# Altium PCB New_LXe_twr.PcbDoc (part 3 of 5)
Units mm, origin at the board's own origin, x right, y up, seen from the top; angles counter-clockwise.
Board outline 130 x 150 mm, 6 copper layers (Top Layer, Internal Plane 1, MidLayer1, MidLayer2, Internal Plane 2, Bottom Layer); 673 components, 504 nets, 5569 pads, 803 vias.
Unrouted connection lines stored in the file: 633.
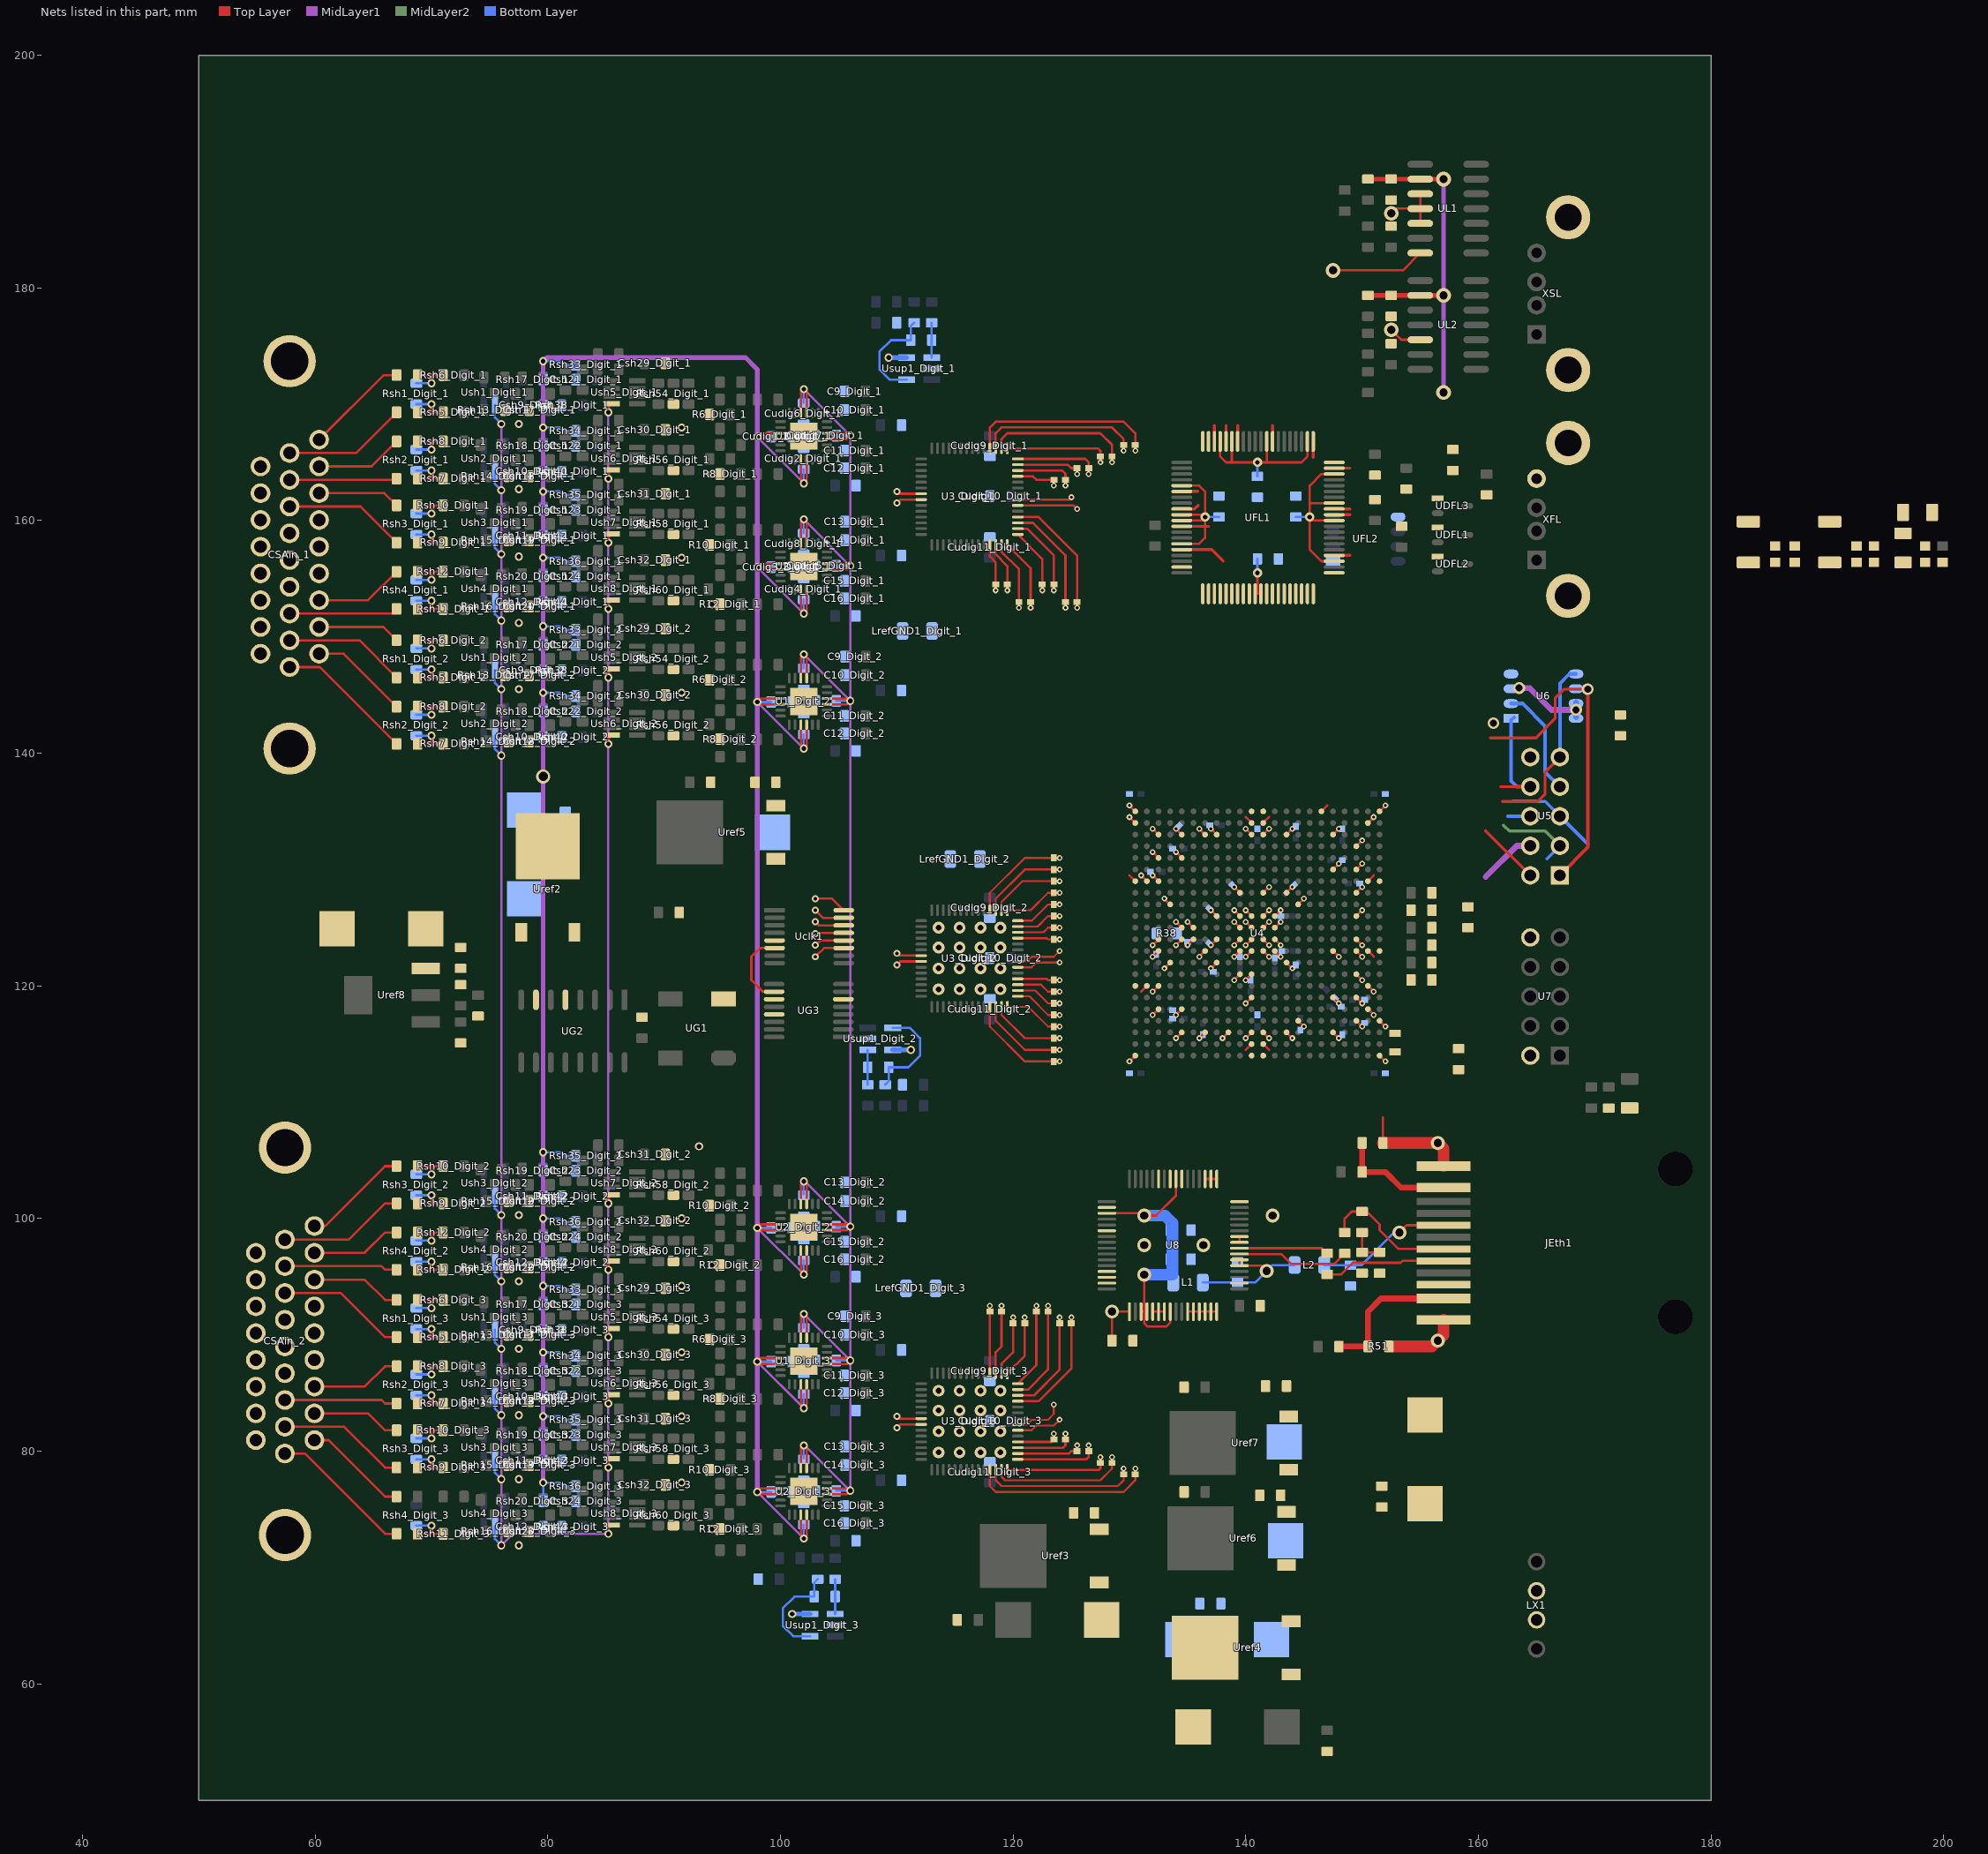
[diagram p7: the nets of this part, all layers, seen from the top]

## Via types
v1: diameter 0.5, hole 0.25, Top Layer to Bottom Layer, tented top, 430 vias
v2: diameter 0.7, hole 0.4, Top Layer to Bottom Layer, 251 vias
v3: diameter 1, hole 0.5, Top Layer to Bottom Layer, 48 vias
v4: diameter 0.6, hole 0.3, Top Layer to Bottom Layer, 31 vias
v5: diameter 1.2, hole 0.7, Top Layer to Bottom Layer, 12 vias
v6: diameter 1.016, hole 0.61, Top Layer to Bottom Layer, 9 vias
v7: diameter 1.27, hole 0.711, Top Layer to Bottom Layer, 9 vias
v8: diameter 5, hole 3, Top Layer to Bottom Layer, 6 vias
v9: diameter 0.8, hole 0.4, Top Layer to Bottom Layer, 4 vias
v10: diameter 0.6, hole 0.3, Top Layer to Bottom Layer, tented top, 2 vias
v11: diameter 1.2, hole 0.8, Top Layer to Bottom Layer, 1 vias

## Nets (pads, with @x,y where several pads share a name; then routed paths per layer and width w, separated by ;. In a path a pad name is that pad's centre, name@x,y a point inside that pad or via, vN(x,y) a via of type N, cw(c..) or ccw(c..) an arc to the next point about the centre after c; other vN are vias at no path point) (continued)
"+3.3 VDIG": C53.1 C54.2 C55.2 C56.2 C57.2 CIO1.2 CIO2.2 CIO3.2 CIO4.2 Csup12.+ Csup18.1 JEth1.1 JEth1.12 L1.1 R37.1 R38.1 R39.1 R40.1 R41.1 R51.1 R53.1 RFL1.1 RFL2.1 RFL3.2 RFL5.2 U4.L18 U5.4 U6.3 U6.7 U6.8 U8.3 U8.4 U8.8 U8.40 U8.51 UFL1.5 UFL1.10 UFL1.11 UFL1.15 UFL1.30 UFL1.31 UFL1.43 UFL1.50 UFL1.53 UFL1.58 UFL1.62 UFL1.69 UFL1.75 UFL1.77 UFL2.5 Uref4.4 | length 102.2
  Top Layer w0.2: U8.51@128.05,100.45 131.075,100.45 v5(131.27,100.255) 132.286,100.255 134,101.969 U8.40@134,103.4 ; U8.3@131,92 131.27,92 ; v5(131.27,95.175) 131.27,92 ; U8.4@131.5,92 131.27,92 ; U8.8@133.5,92 133.5,91.055 133.175,90.73 131.524,90.73 131.27,90.984 131.27,92 ; v1(134,123.5) U4.L18@134.5,124 ; UFL1.15@134.5,158 136,158 136.5,158.5 v9@136.5,160 ; UFL1.11@134.5,160 v9@136.5,160 ; UFL1.10@134.5,160.5 v9@136.5,160.5 ; UFL1.5@134.5,163 136,163 136.5,162.5 v9@136.5,160.5 ; UFL1.77@137.8,166.8 137.8,165.5 138.3,165 v9(141,165) 141.8,165 ; 138.8,165 UFL1.75@138.8,166.8 ; UFL1.30@140.8,153.7 141,153.7 ; v9(141,155.5) 141,153.7 ; UFL1.31@141.3,153.7 141,153.7 ; UFL1.69@141.8,166.8 141.8,165 ; UFL1.62@145.3,166.8 145.3,165.5 144.8,165 141.8,165 ; v9@145.5,160 UFL1.50@147.6,160 ; 145.6,161.5 UFL1.53@147.6,161.5 ; UFL1.43@147.6,156.5 146.5,156.5 145.5,157.5 145.5,163 146.5,164 UFL1.58@147.6,164 ; R53.1@151.8,106.5 151.8,108.7 ; v9@136.5,160 v9(136.5,160.3) v9@136.5,160.5
  Top Layer w1.016: R53.1@151.8,106.5 v5(156.5,106.5) 157,106 JEth1.1@157,104.5 ; R51.1@152.3,89 R51.1@152.554,89 156,89 v5(156.5,89.5) 157,90 JEth1.12@157,91.28
  MidLayer1 w0.508: 160.626,129.374 163.292,132.04 U5.4@164.46,132.04 ; v6(163.5,145.6) 164.4,145.6 166.276,143.724 v6(168.397,143.724)
  Bottom Layer w0.2: v9(136.5,160.3) CIO1.2@137.7,160.3 ; v9(141,155.5) CIO2.2@141,156.7 ; CIO4.2@141,163.8 v9(141,165) ; CIO3.2@144.3,160.3 v9(145.5,160.3)
  Bottom Layer w0.508: U6.8@168.397,143.089 U6.7@168.397,144.359
  Bottom Layer w1: v5(131.27,95.175) 133.7,95.175 133.7,99.6 133.045,100.255 v5(131.27,100.255)
"+5 V": CLED1.1 CSL1.1 CSL2.1 Csup10.+ Csup16.1 Cudig1_Digit_1.2 Cudig1_Digit_2.2 Cudig1_Digit_3.2 Cudig2_Digit_1.2 Cudig2_Digit_2.2 Cudig2_Digit_3.2 Cudig3_Digit_1.2 Cudig3_Digit_2.2 Cudig3_Digit_3.2 Cudig4_Digit_1.2 Cudig4_Digit_2.2 Cudig4_Digit_3.2 RDFL1.1 Rsh17_Digit_1.2 Rsh17_Digit_2.2 Rsh17_Digit_3.2 Rsh18_Digit_1.2 Rsh18_Digit_2.2 Rsh18_Digit_3.2 Rsh19_Digit_1.2 Rsh19_Digit_2.2 Rsh19_Digit_3.2 Rsh20_Digit_1.2 Rsh20_Digit_2.2 Rsh20_Digit_3.2 Rsh33_Digit_1.2 Rsh33_Digit_2.2 Rsh33_Digit_3.2 Rsh34_Digit_1.2 Rsh34_Digit_2.2 Rsh34_Digit_3.2 Rsh35_Digit_1.2 Rsh35_Digit_2.2 Rsh35_Digit_3.2 Rsh36_Digit_1.2 Rsh36_Digit_2.2 Rsh36_Digit_3.2 RSL1.2 RSL5.2 U1_Digit_1.3 U1_Digit_1.4 U1_Digit_1.9 U1_Digit_1.10 U1_Digit_2.3 U1_Digit_2.4 U1_Digit_2.9 U1_Digit_2.10 U1_Digit_3.3 U1_Digit_3.4 U1_Digit_3.9 U1_Digit_3.10 U2_Digit_1.3 U2_Digit_1.4 U2_Digit_1.9 U2_Digit_1.10 U2_Digit_2.3 U2_Digit_2.4 U2_Digit_2.9 U2_Digit_2.10 U2_Digit_3.3 U2_Digit_3.4 U2_Digit_3.9 U2_Digit_3.10 UL1.2 UL2.2 Uref2.4 Usup1_Digit_1.5 Usup1_Digit_2.5 Usup1_Digit_3.5 VDLED1.ANOD VDLED2.ANOD VDLED3.ANOD | length 401.2
  Top Layer w0.2: U2_Digit_3.4@100,76.3 98.2,76.3 v2(98,76.5) 98.3,76.8 U2_Digit_3.3@100,76.8 ; U1_Digit_3.4@100,87.5 98.2,87.5 v2(98,87.7) 98.3,88 U1_Digit_3.3@100,88 ; U2_Digit_2.4@100,99 98.2,99 v2(98,99.2) 98.3,99.5 U2_Digit_2.3@100,99.5 ; U1_Digit_2.4@100,144.2 98.2,144.2 v2(98,144.4) 98.3,144.7 U1_Digit_2.3@100,144.7 ; U2_Digit_1.4@100,155.8 98.2,155.8 v2(98,156) 98.3,156.3 U2_Digit_1.3@100,156.3 ; U1_Digit_1.4@100,167 98.2,167 v2(98,167.2) 98.3,167.5 U1_Digit_1.3@100,167.5 ; U2_Digit_3.9@101.75,74.55 101.75,72.75 v2(102,72.5) 102.25,72.75 U2_Digit_3.10@102.25,74.55 ; U1_Digit_3.9@101.75,85.75 101.75,83.95 v2(102,83.7) 102.25,83.95 U1_Digit_3.10@102.25,85.75 ; U2_Digit_2.9@101.75,97.25 101.75,95.45 v2(102,95.2) 102.25,95.45 U2_Digit_2.10@102.25,97.25 ; U1_Digit_2.9@101.75,142.45 101.75,140.65 v2(102,140.4) 102.25,140.65 U1_Digit_2.10@102.25,142.45 ; U2_Digit_1.9@101.75,154.05 101.75,152.25 v2(102,152) 102.25,152.25 U2_Digit_1.10@102.25,154.05 ; U1_Digit_1.9@101.75,165.25 101.75,163.45 v2(102,163.2) 102.25,163.45 U1_Digit_1.10@102.25,165.25
  Top Layer w0.254: v6@161.009,142.857 v6(161.285,142.581)
  Top Layer w0.4: RSL5.2@150.5,179.35 CSL2.1@152.5,179.35 UL2.2@155,179.35 v7(157,179.35) ; RSL1.2@150.5,189.35 CSL1.1@152.5,189.35 UL1.2@155,189.35 v7(157,189.35)
  MidLayer1 w0.2: v2(98,76.5) v2(102,72.5) ; v2(98,87.7) v2(102,83.7) ; v2(98,99.2) v2(102,95.2) ; v2(98,144.4) v2(102,140.4) ; v2(98,156) v2(102,152) ; v2(98,167.2) v2(102,163.2)
  MidLayer1 w0.4: v2(79.6,77.3) v2(79.6,94.2) v2(79.6,100) v11(79.6,138) v2(79.6,150.9) v2(79.6,156.8) v2(79.6,168) v2(79.6,173.7) 79.9,174 97,174 98,173 v2(98,167.2) v2(98,156) v2(98,144.4) v2(98,99.2) v2(98,87.7) v2(98,76.5) ; v7(157,171) v7(157,179.35) v7(157,189.35)
  Bottom Layer w0.2: Rsh20_Digit_3.2@79.6,75.7 v2(79.6,77.3) 81,77.3 81.3,77 Rsh36_Digit_3.2@82.146,77 Rsh36_Digit_3.2@82.4,77 ; Rsh19_Digit_3.2@79.6,81.4 v2(79.6,83) 81,83 81.3,82.7 Rsh35_Digit_3.2@82.146,82.7 Rsh35_Digit_3.2@82.4,82.7 ; Rsh18_Digit_3.2@79.6,87.256 v2(79.6,88.5) 81,88.5 81.3,88.2 Rsh34_Digit_3.2@82.146,88.2 Rsh34_Digit_3.2@82.4,88.2 ; Rsh17_Digit_3.2@79.6,92.956 v2(79.6,94.2) 81,94.2 81.3,93.9 Rsh33_Digit_3.2@82.146,93.9 Rsh33_Digit_3.2@82.4,93.9 ; Rsh20_Digit_2.2@79.6,98.4 v2(79.6,100) 81,100 81.3,99.7 Rsh36_Digit_2.2@82.146,99.7 Rsh36_Digit_2.2@82.4,99.7 ; Rsh19_Digit_2.2@79.6,104.1 v2(79.6,105.7) 81,105.7 81.3,105.4 Rsh35_Digit_2.2@82.146,105.4 Rsh35_Digit_2.2@82.4,105.4 ; Rsh18_Digit_2.2@79.6,143.6 Rsh18_Digit_2.2@79.6,143.956 v2(79.6,145.2) 81,145.2 81.3,144.9 Rsh34_Digit_2.2@82.146,144.9 Rsh34_Digit_2.2@82.4,144.9 ; Rsh17_Digit_2.2@79.6,149.3 Rsh17_Digit_2.2@79.6,149.656 v2(79.6,150.9) 81,150.9 81.3,150.6 Rsh33_Digit_2.2@82.146,150.6 Rsh33_Digit_2.2@82.4,150.6 ; Rsh20_Digit_1.2@79.6,155.2 v2(79.6,156.8) 81,156.8 81.3,156.5 Rsh36_Digit_1.2@82.146,156.5 Rsh36_Digit_1.2@82.4,156.5 ; Rsh19_Digit_1.2@79.6,160.9 v2(79.6,162.5) 81,162.5 81.3,162.2 Rsh35_Digit_1.2@82.146,162.2 Rsh35_Digit_1.2@82.4,162.2 ; Rsh18_Digit_1.2@79.6,166.4 Rsh18_Digit_1.2@79.6,166.756 v2(79.6,168) 81,168 81.3,167.7 Rsh34_Digit_1.2@82.146,167.7 Rsh34_Digit_1.2@82.4,167.7 ; Rsh17_Digit_1.2@79.6,172.1 Rsh17_Digit_1.2@79.6,172.456 v2(79.6,173.7) 81,173.7 81.3,173.4 Rsh33_Digit_1.2@82.146,173.4 Rsh33_Digit_1.2@82.4,173.4 ; v2(98,76.5) Cudig3_Digit_3.2@99.2,76.5 ; v2(98,87.7) Cudig2_Digit_3.2@99.2,87.7 ; v2(98,99.2) Cudig4_Digit_2.2@99.2,99.2 ; v2(98,144.4) Cudig2_Digit_2.2@99.2,144.4 ; v2(98,156) Cudig3_Digit_1.2@98.946,156 Cudig3_Digit_1.2@99.2,156 ; v2(98,167.2) Cudig1_Digit_1.2@98.946,167.2 Cudig1_Digit_1.2@99.2,167.2 ; v2(102,72.5) Cudig4_Digit_3.2@102,73.7 ; v2(102,83.7) Cudig1_Digit_3.2@102,84.9 ; v2(102,95.2) Cudig3_Digit_2.2@102,96.4 ; v2(102,140.4) Cudig1_Digit_2.2@102,141.6 ; v2(102,152) Cudig4_Digit_1.2@102,152.946 Cudig4_Digit_1.2@102,153.2 ; v2(102,163.2) Cudig2_Digit_1.2@102,164.146 Cudig2_Digit_1.2@102,164.4
  Bottom Layer w0.4: v2(101,66) Usup1_Digit_3.5@102.55,66 ; v2(109.3,174) Usup1_Digit_1.5@110.85,174 ; Usup1_Digit_2.5@109.65,114.5 v2(111.2,114.5)
"+7 V": Csup2.+ Csup3.1 Csup4.1 Csup5.1 Csup6.1 Csup7.1 LX1.2 Uref2.3 Uref3.3 Uref4.3 Uref5.3 Uref6.3 Uref7.3
"+12 V": CSAin_1.23 CSAin_2.23
"-2 V": Csup9.- Csup22.1 Rref2.1 Uref8.3 Ush1_Digit_1.2 Ush1_Digit_2.2 Ush1_Digit_3.2 Ush2_Digit_1.2 Ush2_Digit_2.2 Ush2_Digit_3.2 Ush3_Digit_1.2 Ush3_Digit_2.2 Ush3_Digit_3.2 Ush4_Digit_1.2 Ush4_Digit_2.2 Ush4_Digit_3.2 Ush5_Digit_1.4 Ush5_Digit_2.4 Ush5_Digit_3.4 Ush6_Digit_1.4 Ush6_Digit_2.4 Ush6_Digit_3.4 Ush7_Digit_1.4 Ush7_Digit_2.4 Ush7_Digit_3.4 Ush8_Digit_1.4 Ush8_Digit_2.4 Ush8_Digit_3.4 | length 235.4
  Top Layer w0.2: v2(85.2,72.9) 85.2,73.35 Ush8_Digit_3.4@85.5,73.65 ; v2(85.2,78.6) 85.2,79.05 Ush7_Digit_3.4@85.5,79.35 ; v2(85.2,84.1) 85.2,84.55 Ush6_Digit_3.4@85.5,84.85 ; v2(85.2,89.8) 85.2,90.25 Ush5_Digit_3.4@85.5,90.55 ; v2(85.2,95.6) 85.2,96.05 Ush8_Digit_2.4@85.5,96.35 ; v2(85.2,101.3) 85.2,101.75 Ush7_Digit_2.4@85.5,102.05 ; v2(85.2,140.8) 85.2,141.25 Ush6_Digit_2.4@85.5,141.55 ; v2(85.2,146.5) 85.2,146.95 Ush5_Digit_2.4@85.5,147.25 ; v2(85.2,152.4) 85.2,152.85 Ush8_Digit_1.4@85.5,153.15 ; v2(85.2,158.1) 85.2,158.55 Ush7_Digit_1.4@85.5,158.85 ; v2(85.2,163.6) 85.2,164.05 Ush6_Digit_1.4@85.5,164.35 ; v2(85.2,169.3) 85.2,169.75 Ush5_Digit_1.4@85.5,170.05
  MidLayer1 w0.2: v2(76,168.3) v2(76,162.6) v2(76,157.1) v2(76,151.4) v2(76,145.5) v2(76,139.8) v2(76,100.3) v2(76,94.6) v2(76,88.8) v2(76,83.1) v2(76,77.6) v2(76,71.9) 77,72.9 v2(85.2,72.9) v2(85.2,84.1) v2(85.2,89.8) v2(85.2,95.6) v2(85.2,140.8) v2(85.2,146.5) v2(85.2,152.4) v2(85.2,163.6) v2(85.2,169.3)
  Bottom Layer w0.2: Ush4_Digit_3.2@75.45,73.55 75.45,72.45 v2(76,71.9) ; Ush3_Digit_3.2@75.45,79.25 75.45,78.15 v2(76,77.6) ; Ush2_Digit_3.2@75.45,84.75 75.45,83.65 v2(76,83.1) ; Ush1_Digit_3.2@75.45,90.45 75.45,89.35 v2(76,88.8) ; Ush4_Digit_2.2@75.45,96.25 75.45,95.15 v2(76,94.6) ; Ush3_Digit_2.2@75.45,101.95 75.45,100.85 v2(76,100.3) ; Ush2_Digit_2.2@75.45,141.45 75.45,140.35 v2(76,139.8) ; Ush1_Digit_2.2@75.45,147.15 75.45,146.05 v2(76,145.5) ; Ush4_Digit_1.2@75.45,153.05 75.45,151.95 v2(76,151.4) ; Ush3_Digit_1.2@75.45,158.75 75.45,157.65 v2(76,157.1) ; Ush2_Digit_1.2@75.45,164.25 75.45,163.15 v2(76,162.6) ; Ush1_Digit_1.2@75.45,169.95 75.45,168.85 v2(76,168.3)
"-3 V": Cudig5_Digit_1.2 Cudig5_Digit_2.2 Cudig5_Digit_3.2 Cudig6_Digit_1.2 Cudig6_Digit_2.2 Cudig6_Digit_3.2 Cudig7_Digit_1.2 Cudig7_Digit_2.2 Cudig7_Digit_3.2 Cudig8_Digit_1.2 Cudig8_Digit_2.2 Cudig8_Digit_3.2 U1_Digit_1.15 U1_Digit_1.16 U1_Digit_1.21 U1_Digit_1.22 U1_Digit_2.15 U1_Digit_2.16 U1_Digit_2.21 U1_Digit_2.22 U1_Digit_3.15 U1_Digit_3.16 U1_Digit_3.21 U1_Digit_3.22 U2_Digit_1.15 U2_Digit_1.16 U2_Digit_1.21 U2_Digit_1.22 U2_Digit_2.15 U2_Digit_2.16 U2_Digit_2.21 U2_Digit_2.22 U2_Digit_3.15 U2_Digit_3.16 U2_Digit_3.21 U2_Digit_3.22 | length 189.1
  Top Layer w0.2: U2_Digit_3.22@101.75,78.55 101.75,80.25 v2(102,80.5) 102.25,80.25 U2_Digit_3.21@102.25,78.55 ; U1_Digit_3.22@101.75,89.75 101.75,91.55 v2(102,91.8) 102.25,91.55 U1_Digit_3.21@102.25,89.75 ; U2_Digit_2.22@101.75,101.25 101.75,102.95 v2(102,103.2) 102.25,102.95 U2_Digit_2.21@102.25,101.25 ; U1_Digit_2.22@101.75,146.45 101.75,148.25 v2(102,148.5) 102.25,148.25 U1_Digit_2.21@102.25,146.45 ; U2_Digit_1.22@101.75,158.05 101.75,159.85 v2(102,160.1) 102.25,159.85 U2_Digit_1.21@102.25,158.05 ; U1_Digit_1.22@101.75,169.25 101.75,171.05 v2(102,171.3) 102.25,171.05 U1_Digit_1.21@102.25,169.25 ; U2_Digit_3.15@104,76.3 105.7,76.3 v2(106,76.6) 105.8,76.8 U2_Digit_3.16@104,76.8 ; U1_Digit_3.15@104,87.5 105.7,87.5 v2(106,87.8) 105.8,88 U1_Digit_3.16@104,88 ; U2_Digit_2.15@104,99 105.7,99 v2(106,99.3) 105.8,99.5 U2_Digit_2.16@104,99.5 ; U1_Digit_2.15@104,144.2 105.7,144.2 v2(106,144.5) 105.8,144.7 U1_Digit_2.16@104,144.7 ; U2_Digit_1.15@104,155.8 105.7,155.8 v2(106,156.1) 105.8,156.3 U2_Digit_1.16@104,156.3 ; U1_Digit_1.15@104,167 105.7,167 v2(106,167.3) 105.8,167.5 U1_Digit_1.16@104,167.5
  MidLayer1 w0.2: v2(102,91.8) v2(106,87.8) v2(106,76.6) v2@102.1,80.5 ; v2(102,148.5) v2(106,144.5) ; v2(102,160.1) v2(106,156.1) ; v2(102,171.3) v2(106,167.3) v2(106,156.1) ; v2@102.1,103.2 v2(106,99.3) ; v2@106,88.1 v2(106,99.3) ; v2(106,99.3) v2(106,144.5) ; v2(106,144.5) v2(106,156.1)
  Bottom Layer w0.2: Cudig7_Digit_3.2@102,79.4 102,79.654 v2@102,80.6 ; Cudig6_Digit_3.2@102,90.6 102,90.854 v2(102,91.8) ; Cudig7_Digit_2.2@102,102.1 102,102.354 v2@102,103.3 ; Cudig6_Digit_2.2@102,147.3 102,147.554 v2(102,148.5) ; Cudig8_Digit_1.2@102,158.9 Cudig8_Digit_1.2@102,159.154 v2(102,160.1) ; Cudig6_Digit_1.2@102,170.1 Cudig6_Digit_1.2@102,170.354 v2(102,171.3) ; Cudig8_Digit_3.2@104.8,76.6 v2(106,76.6) ; Cudig5_Digit_3.2@104.8,87.8 v2(106,87.8) ; Cudig8_Digit_2.2@104.8,99.3 v2(106,99.3) ; Cudig5_Digit_2.2@104.8,144.5 v2(106,144.5) ; Cudig5_Digit_1.2@104.8,156.1 v2(106,156.1) ; Cudig7_Digit_1.2@104.8,167.3 v2(106,167.3)
"-6 V": CSAin_1.22 CSAin_2.22
ADC_1_CLK_N: U3_Digit_1.21 Uclk1.15 | length 4.9
  Top Layer w0.2: v4(103,126.5) 103.65,125.85 Uclk1.15@105.44,125.85 ; v4(110,162.5) 110.2,162.3 U3_Digit_1.21@112.1,162.3
ADC_1_CLK_P: U3_Digit_1.22 Uclk1.16 | length 5.1
  Top Layer w0.2: v4(103,127.5) 104.44,127.5 Uclk1.16@105.44,126.5 ; v4(110,161.5) 110.3,161.8 U3_Digit_1.22@112.1,161.8
ADC_2_CLK_N: U3_Digit_2.21 Uclk1.13 | length 4.6
  Top Layer w0.2: v4(103,124.5) 103.05,124.55 Uclk1.13@105.44,124.55 ; v4(110,122.8) 110.2,122.6 U3_Digit_2.21@112.1,122.6
ADC_2_CLK_P: U3_Digit_2.22 Uclk1.14 | length 4.8
  Top Layer w0.2: v4(103,125.5) 103.3,125.2 Uclk1.14@105.44,125.2 ; v4(110,121.8) 110.3,122.1 U3_Digit_2.22@112.1,122.1
ADC_3_CLK_N: U3_Digit_3.21 Uclk1.11 | length 4.9
  Top Layer w0.2: v4(103,122.5) 103.75,123.25 Uclk1.11@105.44,123.25 ; v4(110,83) 110.2,82.8 U3_Digit_3.21@112.1,82.8
ADC_3_CLK_P: U3_Digit_3.22 Uclk1.12 | length 4.8
  Top Layer w0.2: v4(103,123.5) 103.4,123.9 Uclk1.12@105.44,123.9 ; v4(110,82) 110.3,82.3 U3_Digit_3.22@112.1,82.3
ADC_CLK: Uclk1.6 UG3.10 | length 6.7
  Top Layer w0.2: UG3.10@99.46,119.5 98.5,119.5 97.5,120.5 97.5,122.5 98.25,123.25 Uclk1.6@99.5,123.25
ADC_DCH1_0+: R30_Digit_1.1 U3_Digit_1.3 | length 13.9
  Top Layer w0.175: v1(129.5,166) R30_Digit_1.1@129.5,166.5
  Top Layer w0.2: U3_Digit_1.3@118.5,166.2 118.5,167.5 119,168 128.5,168 129.5,167 R30_Digit_1.1@129.5,166.5
ADC_DCH1_0-: R30_Digit_1.2 U3_Digit_1.4 | length 16.4
  Top Layer w0.175: v1(130.5,166) R30_Digit_1.2@130.5,166.5
  Top Layer w0.2: U3_Digit_1.4@118,166.2 118,168 118.5,168.5 129.5,168.5 130.5,167.5 R30_Digit_1.2@130.5,166.5
ADC_DCH1_1+: R29_Digit_1.1 U3_Digit_1.1 | length 9.1
  Top Layer w0.175: v1(127.5,165) R29_Digit_1.1@127.5,165.5
  Top Layer w0.2: U3_Digit_1.1@119.5,166.2 127.3,166.2 127.5,166 R29_Digit_1.1@127.5,165.5
ADC_DCH1_1-: R29_Digit_1.2 U3_Digit_1.2 | length 12.4
  Top Layer w0.175: v1(128.5,165) R29_Digit_1.2@128.5,165.5
  Top Layer w0.2: U3_Digit_1.2@119,166.2 119,167 119.5,167.5 127.5,167.5 128.5,166.5 R29_Digit_1.2@128.5,165.5
ADC_DCH2_0+: R31_Digit_1.2 U3_Digit_1.55 | length 5.7
  Top Layer w0.175: v1(125.5,164) R31_Digit_1.2@125.5,164.5
  Top Layer w0.2: U3_Digit_1.55@120.4,164.8 124.7,164.8 125,164.5 R31_Digit_1.2@125.5,164.5
ADC_DCH2_0-: R31_Digit_1.1 U3_Digit_1.56 | length 7.2
  Top Layer w0.175: v1(126.5,164) R31_Digit_1.1@126.5,164.5
  Top Layer w0.2: U3_Digit_1.56@120.4,165.3 126.2,165.3 126.5,165 R31_Digit_1.1@126.5,164.5
ADC_DCH2_1+: R32_Digit_1.2 U3_Digit_1.53 | length 3.7
  Top Layer w0.175: v1(123.5,163) R32_Digit_1.2@123.5,163.5
  Top Layer w0.2: U3_Digit_1.53@120.4,163.8 121.7,163.8 122,163.5 R32_Digit_1.2@123.5,163.5
ADC_DCH2_1-: R32_Digit_1.1 U3_Digit_1.54 | length 5.2
  Top Layer w0.175: v1(124.5,163) R32_Digit_1.1@124.5,163.5
  Top Layer w0.2: U3_Digit_1.54@120.4,164.3 124.2,164.3 124.5,164 R32_Digit_1.1@124.5,163.5
ADC_DCH3_0+: R33_Digit_1.2 U3_Digit_1.45 | length 9.8
  Top Layer w0.175: v1(124.5,152.5) R33_Digit_1.2@124.5,153
  Top Layer w0.2: U3_Digit_1.45@120.4,159.8 121.7,159.8 124.5,157 R33_Digit_1.2@124.5,153
ADC_DCH3_0-: R33_Digit_1.1 U3_Digit_1.46 | length 11
  Top Layer w0.175: v1(125.5,152.5) R33_Digit_1.1@125.5,153
  Top Layer w0.2: U3_Digit_1.46@120.4,160.3 122.2,160.3 125.5,157 R33_Digit_1.1@125.5,153
ADC_DCH3_1+: R34_Digit_1.2 U3_Digit_1.43 | length 5.7
  Top Layer w0.175: v1(122.5,154) R34_Digit_1.2@122.5,154.5
  Top Layer w0.2: U3_Digit_1.43@120.4,158.8 122.5,156.7 R34_Digit_1.2@122.5,154.5
ADC_DCH3_1-: R34_Digit_1.1 U3_Digit_1.44 | length 7.1
  Top Layer w0.175: v1(123.5,154) R34_Digit_1.1@123.5,154.5
  Top Layer w0.2: U3_Digit_1.44@120.4,159.3 121.2,159.3 123.5,157 R34_Digit_1.1@123.5,154.5
ADC_DCH4_0+: R35_Digit_1.2 U3_Digit_1.41 | length 6
  Top Layer w0.175: v1(120.5,152.5) R35_Digit_1.2@120.5,153
  Top Layer w0.2: U3_Digit_1.41@119,157.9 119,157.3 120.5,155.8 R35_Digit_1.2@120.5,153
ADC_DCH4_0-: R35_Digit_1.1 U3_Digit_1.42 | length 6.2
  Top Layer w0.175: v1(121.5,152.5) R35_Digit_1.1@121.5,153
  Top Layer w0.2: U3_Digit_1.42@119.5,157.9 121.5,155.9 R35_Digit_1.1@121.5,153
ADC_DCH4_1+: R36_Digit_1.2 U3_Digit_1.39 | length 4.1
  Top Layer w0.175: v1(118.5,154) R36_Digit_1.2@118.5,154.5
  Top Layer w0.2: U3_Digit_1.39@118,157.9 118,156.9 118.5,156.4 R36_Digit_1.2@118.5,154.5
ADC_DCH4_1-: R36_Digit_1.1 U3_Digit_1.40 | length 4.3
  Top Layer w0.175: v1(119.5,154) R36_Digit_1.1@119.5,154.5
  Top Layer w0.2: U3_Digit_1.40@118.5,157.9 118.5,157.1 119.5,156.1 R36_Digit_1.1@119.5,154.5
ADC_DCH5_0+: R30_Digit_2.1 U3_Digit_2.3 | length 7.5
  Top Layer w0.175: U3_Digit_2.3@118.5,126.5 118.5,127.5 121,130 v1(124,130)
ADC_DCH5_0-: R30_Digit_2.2 U3_Digit_2.4 | length 8.7
  Top Layer w0.175: U3_Digit_2.4@118,126.5 118,128 121,131 v1(124,131)
ADC_DCH5_5+: R29_Digit_2.1 U3_Digit_2.1 | length 5.1
  Top Layer w0.175: U3_Digit_2.1@119.5,126.5 121.5,126.5 123,128 v1(124,128)
ADC_DCH5_5-: R29_Digit_2.2 U3_Digit_2.2 | length 6.4
  Top Layer w0.175: U3_Digit_2.2@119,126.5 119,127.2 120.8,129 v1(124,129)
ADC_DCH6_0+: R31_Digit_2.2 U3_Digit_2.55 | length 4
  Top Layer w0.175: U3_Digit_2.55@120.4,125.1 122.1,125.1 123,126 R31_Digit_2.2@123.5,126 v1(124,126)
ADC_DCH6_0-: R31_Digit_2.1 U3_Digit_2.56 | length 4.2
  Top Layer w0.175: U3_Digit_2.56@120.4,125.6 121.6,125.6 123,127 R31_Digit_2.1@123.5,127 v1(124,127)
ADC_DCH6_1+: R32_Digit_2.2 U3_Digit_2.53 | length 3.6
  Top Layer w0.175: U3_Digit_2.53@120.4,124.1 122.9,124.1 123,124 R32_Digit_2.2@123.5,124 v1(124,124)
ADC_DCH6_1-: R32_Digit_2.1 U3_Digit_2.54 | length 3.8
  Top Layer w0.175: U3_Digit_2.54@120.4,124.6 122.6,124.6 123,125 R32_Digit_2.1@123.5,125 v1(124,125)
ADC_DCH7_0+: R33_Digit_2.2 U3_Digit_2.45 | length 3.8
  Top Layer w0.175: U3_Digit_2.45@120.4,120.1 122.4,120.1 123,119.5 R33_Digit_2.2@123.5,119.5 v1(124,119.5)
ADC_DCH7_0-: R33_Digit_2.1 U3_Digit_2.46 | length 3.6
  Top Layer w0.175: U3_Digit_2.46@120.4,120.6 122.9,120.6 123,120.5 R33_Digit_2.1@123.5,120.5 v1(124,120.5)
ADC_DCH7_1+: R34_Digit_2.2 U3_Digit_2.43 | length 4.3
  Top Layer w0.175: U3_Digit_2.43@120.4,119.1 121.4,119.1 123,117.5 R34_Digit_2.2@123.5,117.5 v1(124,117.5)
ADC_DCH7_1-: R34_Digit_2.1 U3_Digit_2.44 | length 4.1
  Top Layer w0.175: U3_Digit_2.44@120.4,119.6 121.9,119.6 123,118.5 R34_Digit_2.1@123.5,118.5 v1(124,118.5)
ADC_DCH8_0+: R35_Digit_2.2 U3_Digit_2.41 | length 6.5
  Top Layer w0.175: U3_Digit_2.41@119,118.2 119,117.5 121,115.5 R35_Digit_2.2@123.5,115.5 v1(124,115.5)
ADC_DCH8_0-: R35_Digit_2.1 U3_Digit_2.42 | length 5.2
  Top Layer w0.175: U3_Digit_2.42@119.5,118.2 121.3,118.2 123,116.5 R35_Digit_2.1@123.5,116.5 v1(124,116.5)
ADC_DCH8_1+: R36_Digit_2.2 U3_Digit_2.39 | length 8.9
  Top Layer w0.175: U3_Digit_2.39@118,118.2 118,116.5 121,113.5 R36_Digit_2.2@123.5,113.5 v1(124,113.5)
ADC_DCH8_1-: R36_Digit_2.1 U3_Digit_2.40 | length 7.7
  Top Layer w0.175: U3_Digit_2.40@118.5,118.2 118.5,117 121,114.5 R36_Digit_2.1@123.5,114.5 v1(124,114.5)
ADC_DCH9_0+: R30_Digit_3.1 U3_Digit_3.3 | length 6
  Top Layer w0.175: R30_Digit_3.1@119,92 v1(119,92.5)
  Top Layer w0.2: U3_Digit_3.3@118.5,86.7 118.5,88.5 119,89 R30_Digit_3.1@119,92
ADC_DCH9_0-: R30_Digit_3.2 U3_Digit_3.4 | length 5.8
  Top Layer w0.175: R30_Digit_3.2@118,92 v1(118,92.5)
  Top Layer w0.2: U3_Digit_3.4@118,86.7 R30_Digit_3.2@118,92
ADC_DCH9_9+: R29_Digit_3.1 U3_Digit_3.1 | length 5.4
  Top Layer w0.175: R29_Digit_3.1@121,91 v1(121,91.5)
  Top Layer w0.2: U3_Digit_3.1@119.5,86.7 121,88.2 R29_Digit_3.1@121,91
ADC_DCH9_9-: R29_Digit_3.2 U3_Digit_3.2 | length 5.2
  Top Layer w0.175: R29_Digit_3.2@120,91 v1(120,91.5)
  Top Layer w0.2: U3_Digit_3.2@119,86.7 119,87.5 120,88.5 R29_Digit_3.2@120,91
ADC_DCH10_0+: R31_Digit_3.2 U3_Digit_3.55 | length 8.8
  Top Layer w0.175: R31_Digit_3.2@123,92 v1(123,92.5)
  Top Layer w0.2: U3_Digit_3.55@120.4,85.3 121.3,85.3 123,87 R31_Digit_3.2@123,92
ADC_DCH10_0-: R31_Digit_3.1 U3_Digit_3.56 | length 7.4
  Top Layer w0.175: R31_Digit_3.1@122,92 v1(122,92.5)
  Top Layer w0.2: U3_Digit_3.56@120.4,85.8 122,87.4 R31_Digit_3.1@122,92
ADC_DCH10_1+: R32_Digit_3.2 U3_Digit_3.53 | length 10.2
  Top Layer w0.175: R32_Digit_3.2@125,91 v1(125,91.5)
  Top Layer w0.2: U3_Digit_3.53@120.4,84.3 122.2,84.3 125,87.1 R32_Digit_3.2@125,91
ADC_DCH10_1-: R32_Digit_3.1 U3_Digit_3.54 | length 9
  Top Layer w0.175: R32_Digit_3.1@124,91 v1(124,91.5)
  Top Layer w0.2: U3_Digit_3.54@120.4,84.8 121.8,84.8 124,87 R32_Digit_3.1@124,91
ADC_DCH11_0+: R33_Digit_3.2 U3_Digit_3.45 | length 5.2
  Top Layer w0.175: R33_Digit_3.2@124.5,81 v1(124.5,81.5)
  Top Layer w0.2: U3_Digit_3.45@120.4,80.3 124.3,80.3 124.5,80.5 R33_Digit_3.2@124.5,81
ADC_DCH11_0-: R33_Digit_3.1 U3_Digit_3.46 | length 3.7
  Top Layer w0.175: R33_Digit_3.1@123.5,81 v1(123.5,81.5)
  Top Layer w0.2: U3_Digit_3.46@120.4,80.8 123.3,80.8 R33_Digit_3.1@123.5,81
ADC_DCH11_1+: R34_Digit_3.2 U3_Digit_3.43 | length 7.2
  Top Layer w0.175: R34_Digit_3.2@126.5,80 v1(126.5,80.5)
  Top Layer w0.2: U3_Digit_3.43@120.4,79.3 126.3,79.3 126.5,79.5 R34_Digit_3.2@126.5,80
ADC_DCH11_1-: R34_Digit_3.1 U3_Digit_3.44 | length 5.7
  Top Layer w0.175: R34_Digit_3.1@125.5,80 v1(125.5,80.5)
  Top Layer w0.2: U3_Digit_3.44@120.4,79.8 124.8,79.8 125,80 R34_Digit_3.1@125.5,80
ADC_DCH12_0+: R35_Digit_3.2 U3_Digit_3.41 | length 11.6
  Top Layer w0.175: U3_Digit_3.41@119,78.4 119,77.8 119.3,77.5 127.5,77.5 128.5,78.5 R35_Digit_3.2@128.5,79 v1(128.5,79.5)
ADC_DCH12_0-: R35_Digit_3.1 U3_Digit_3.42 | length 9
  Top Layer w0.175: R35_Digit_3.1@127.5,79 v1(127.5,79.5)
  Top Layer w0.2: U3_Digit_3.42@119.5,78.4 127.4,78.4 127.5,78.5 R35_Digit_3.1@127.5,79
ADC_DCH12_1+: R36_Digit_3.2 U3_Digit_3.39 | length 15.5
  Top Layer w0.175: U3_Digit_3.39@118,78.4 118,77 118.5,76.5 129.5,76.5 130.5,77.5 R36_Digit_3.2@130.5,78 v1(130.5,78.5)
ADC_DCH12_1-: R36_Digit_3.1 U3_Digit_3.40 | length 13.3
  Top Layer w0.175: U3_Digit_3.40@118.5,78.4 118.5,77.5 119,77 129,77 129.5,77.5 R36_Digit_3.1@129.5,78 v1(129.5,78.5)
AGND: C1_Digit_1.1 C1_Digit_2.1 C1_Digit_3.1 C2_Digit_1.1 C2_Digit_2.1 C2_Digit_3.1 C3_Digit_1.1 C3_Digit_2.1 C3_Digit_3.1 C4_Digit_1.1 C4_Digit_2.1 C4_Digit_3.1 C9_Digit_1.2 C9_Digit_2.2 C9_Digit_3.2 C10_Digit_1.1 C10_Digit_2.1 C10_Digit_3.1 C11_Digit_1.2 C11_Digit_2.2 C11_Digit_3.2 C12_Digit_1.1 C12_Digit_2.1 C12_Digit_3.1 C13_Digit_1.2 C13_Digit_2.2 C13_Digit_3.2 C14_Digit_1.1 C14_Digit_2.1 C14_Digit_3.1 C15_Digit_1.2 C15_Digit_2.2 C15_Digit_3.2 C16_Digit_1.1 C16_Digit_2.1 C16_Digit_3.1 CSAin_1.4 CSAin_1.5 CSAin_1.6 CSAin_1.13 CSAin_1.14 CSAin_1.15 CSAin_1.19 CSAin_1.20 CSAin_1.21 CSAin_1.24 CSAin_1.25 CSAin_1.26 CSAin_1.27 CSAin_1.28 CSAin_2.4 CSAin_2.5 CSAin_2.6 CSAin_2.13 CSAin_2.14 CSAin_2.15 CSAin_2.19 CSAin_2.20 CSAin_2.21 CSAin_2.24 CSAin_2.25 CSAin_2.26 CSAin_2.27 CSAin_2.28 Csh9_Digit_1.2 Csh9_Digit_2.2 Csh9_Digit_3.2 Csh10_Digit_1.2 Csh10_Digit_2.2 Csh10_Digit_3.2 Csh11_Digit_1.2 Csh11_Digit_2.2 Csh11_Digit_3.2 Csh12_Digit_1.2 Csh12_Digit_2.2 Csh12_Digit_3.2 Csh17_Digit_1.2 Csh17_Digit_2.2 Csh17_Digit_3.2 Csh18_Digit_1.2 Csh18_Digit_2.2 Csh18_Digit_3.2 Csh19_Digit_1.2 Csh19_Digit_2.2 Csh19_Digit_3.2 Csh20_Digit_1.2 Csh20_Digit_2.2 Csh20_Digit_3.2 Csh21_Digit_1.2 Csh21_Digit_2.2 Csh21_Digit_3.2 Csh22_Digit_1.2 Csh22_Digit_2.2 Csh22_Digit_3.2 Csh23_Digit_1.2 Csh23_Digit_2.2 Csh23_Digit_3.2 Csh24_Digit_1.2 Csh24_Digit_2.2 Csh24_Digit_3.2 Csh29_Digit_1.2 Csh29_Digit_2.2 Csh29_Digit_3.2 Csh30_Digit_1.2 Csh30_Digit_2.2 Csh30_Digit_3.2 Csh31_Digit_1.2 Csh31_Digit_2.2 Csh31_Digit_3.2 Csh32_Digit_1.2 Csh32_Digit_2.2 Csh32_Digit_3.2 Csup1.2 Csup8.2 Csup9.+ Csup10.- Csup16.2 Csup22.2 Csup_1.- Cudig1_Digit_1.1 Cudig1_Digit_2.1 Cudig1_Digit_3.1 Cudig2_Digit_1.1 Cudig2_Digit_2.1 Cudig2_Digit_3.1 Cudig3_Digit_1.1 Cudig3_Digit_2.1 Cudig3_Digit_3.1 Cudig4_Digit_1.1 Cudig4_Digit_2.1 Cudig4_Digit_3.1 Cudig5_Digit_1.1 Cudig5_Digit_2.1 Cudig5_Digit_3.1 Cudig6_Digit_1.1 Cudig6_Digit_2.1 Cudig6_Digit_3.1 Cudig7_Digit_1.1 Cudig7_Digit_2.1 Cudig7_Digit_3.1 Cudig8_Digit_1.1 Cudig8_Digit_2.1 Cudig8_Digit_3.1 LrefGND1_Digit_1.1 LrefGND1_Digit_2.1 LrefGND1_Digit_3.1 R6_Digit_1.2 R6_Digit_2.2 R6_Digit_3.2 R8_Digit_1.2 R8_Digit_2.2 R8_Digit_3.2 R10_Digit_1.2 R10_Digit_2.2 R10_Digit_3.2 R12_Digit_1.2 R12_Digit_2.2 R12_Digit_3.2 R41_Digit_1.2 R41_Digit_2.2 R41_Digit_3.2 Rref1.2 Rsh13_Digit_1.2 Rsh13_Digit_2.2 Rsh13_Digit_3.2 Rsh14_Digit_1.2 Rsh14_Digit_2.2 Rsh14_Digit_3.2 Rsh15_Digit_1.2 Rsh15_Digit_2.2 Rsh15_Digit_3.2 Rsh16_Digit_1.2 Rsh16_Digit_2.2 Rsh16_Digit_3.2 Rsh38_Digit_1.1 Rsh38_Digit_2.1 Rsh38_Digit_3.1 Rsh40_Digit_1.1 Rsh40_Digit_2.1 Rsh40_Digit_3.1 Rsh42_Digit_1.1 Rsh42_Digit_2.1 Rsh42_Digit_3.1 Rsh44_Digit_1.1 Rsh44_Digit_2.1 Rsh44_Digit_3.1 Rsh54_Digit_1.1 Rsh54_Digit_2.1 Rsh54_Digit_3.1 Rsh56_Digit_1.1 Rsh56_Digit_2.1 Rsh56_Digit_3.1 Rsh58_Digit_1.1 Rsh58_Digit_2.1 Rsh58_Digit_3.1 Rsh60_Digit_1.1 Rsh60_Digit_2.1 Rsh60_Digit_3.1 U1_Digit_1.25 U1_Digit_2.25 U1_Digit_3.25 U2_Digit_1.25 U2_Digit_2.25 U2_Digit_3.25 Uref2.1 Usup1_Digit_1.2 Usup1_Digit_2.2 Usup1_Digit_3.2
  other v2: 77.5,71.9 94.1,73.3 102,76.5 91.5,77.3 77.5,77.6 91.5,83 77.5,83.1 94.1,84.5 102,87.7 91.5,88.5 77.5,88.8 91.5,94.2 77.5,94.6 94.1,96 102,99.2 91.5,100 77.5,100.3 93,106.2 94.1,141.2 102,144.4 91.5,145.2 77.5,145.5 77.5,151.2 94.1,152.8 102,156 91.5,156.8 77.5,156.9 77.5,162.7 94.1,164 102,167.2 91.5,168 77.5,168.3
"AS ASD": U4.D1 U5.9 U6.5 | length 16.4
  Top Layer w0.2: U4.D1@151.5,117 v1(152,116.5)
  Top Layer w0.254: 162.047,135.85 165.095,135.85 165.73,136.485 165.73,138.39 U5.9@167,139.66
  Bottom Layer w0.305: U5.9@167,139.66 167,146 167.81,146.81 U6.5@168.388,146.81
"AS DATA": U4.K1 U5.7 U6.2 | length 9.5
  Bottom Layer w0.305: U6.2@162.8,144.27 163.787,144.27 165.73,142.327 165.73,138.39 U5.7@167,137.12
"AS DCLK": U4.K2 U5.1 U6.6 | length 30
  Top Layer w0.2: U4.K2@150.5,123 151,122.5
  Top Layer w0.254: 161.031,141.311 164.943,141.311 166.595,142.963 166.595,144.741 167.354,145.5 v6(169.4,145.5)
  Top Layer w0.305: U5.1@167,129.5 169.413,131.913 v6@169.413,145.629
  Bottom Layer w0.254: U6.6@168.388,145.54 168.428,145.5 v6(169.4,145.5)
"AS NCE": R43.1 U4.L3 U5.6 | length 2.6
  Top Layer w0.2: U4.L3@149.5,124 v1(150,123.5)
  Bottom Layer w0.305: 162.532,134.58 U5.6@164.46,134.58
"AS NCS": U4.E2 U5.8 U6.1 | length 10.7
  Top Layer w0.2: U4.E2@150.5,118 v1(151,117.5)
  Top Layer w0.254: 161.92,137.12 U5.8@164.46,137.12
  Bottom Layer w0.305: U6.1@163.063,143.089 162.809,142.835 162.809,137.628 163.317,137.12 U5.8@164.46,137.12
C_C_LIGHT: RLED1.2
COL: U8.62
CONF_DONE: R38.2 U4.M18 U5.3 | length 7.9
  Top Layer w0.2: v1(134,125.5) U4.M18@134.5,125
  MidLayer2 w0.254: 162.15,133.819 162.658,133.311 165.729,133.311 U5.3@167,132.04
  Bottom Layer w0.254: 165.88,130.92 U5.3@167,132.04
CRS: U8.63
CSA_IN+_1: CSAin_1.18 Csh1_Digit_1.1 | length 10.6
  Top Layer w0.2: CSAin_1.18@57.8,165.8 63.5,165.8 Csh1_Digit_1.1@67,169.3
CSA_IN+_2: CSAin_1.17 Csh3_Digit_1.1 | length 9.2
  Top Layer w0.2: CSAin_1.17@57.8,163.5 66.9,163.5 Csh3_Digit_1.1@67,163.6
CSA_IN+_3: CSAin_1.16 Csh5_Digit_1.1 | length 10.7
  Top Layer w0.2: CSAin_1.16@57.8,161.2 63.9,161.2 Csh5_Digit_1.1@67,158.1 Csh5_Digit_1.1@66.746,158.1
CSA_IN+_4: CSAin_1.12 Csh7_Digit_1.1 | length 9.4
  Top Layer w0.2: CSAin_1.12@57.8,152 66.6,152 Csh7_Digit_1.1@67,152.4
CSA_IN+_5: CSAin_1.11 Csh1_Digit_2.1 | length 10.5
  Top Layer w0.2: CSAin_1.11@57.8,149.7 63.8,149.7 Csh1_Digit_2.1@67,146.5
CSA_IN+_6: CSAin_1.10 Csh3_Digit_2.1 | length 12.1
  Top Layer w0.2: CSAin_1.10@57.8,147.4 60.4,147.4 66.746,141.054 66.746,140.8 Csh3_Digit_2.1@67,140.8
CSA_IN+_7: CSAin_2.18 Csh5_Digit_2.1 | length 10.9
  Top Layer w0.2: CSAin_2.18@57.4,98.2 62.9,98.2 66,101.3 66.746,101.3 Csh5_Digit_2.1@67,101.3
CSA_IN+_8: CSAin_2.17 Csh7_Digit_2.1 | length 9.7
  Top Layer w0.2: CSAin_2.17@57.4,95.9 65.7,95.9 66,95.6 66.746,95.6 Csh7_Digit_2.1@67,95.6
CSA_IN+_9: CSAin_2.16 Csh1_Digit_3.1 | length 11.2
  Top Layer w0.2: CSAin_2.16@57.4,93.6 62.2,93.6 66,89.8 Csh1_Digit_3.1@67,89.8
CSA_IN+_10: CSAin_2.12 Csh3_Digit_3.1 | length 9.7
  Top Layer w0.2: CSAin_2.12@57.4,84.4 65.7,84.4 66,84.1 66.746,84.1 Csh3_Digit_3.1@67,84.1
CSA_IN+_11: CSAin_2.11 Csh5_Digit_3.1 | length 11
  Top Layer w0.2: CSAin_2.11@57.4,82.1 62.5,82.1 66.012,78.588 Csh5_Digit_3.1@66.988,78.588
CSA_IN+_12: CSAin_2.10 Csh7_Digit_3.1 | length 12.5
  Top Layer w0.2: CSAin_2.10@57.4,79.8 59.1,79.8 66,72.9 66.746,72.9 Csh7_Digit_3.1@67,72.9
CSA_IN-_1: CSAin_1.9 Csh2_Digit_1.1 | length 9
  Top Layer w0.2: CSAin_1.9@60.34,166.95 65.89,172.5 66.746,172.5 Csh2_Digit_1.1@67,172.5
CSA_IN-_2: CSAin_1.8 Csh4_Digit_1.1 | length 7.6
  Top Layer w0.2: CSAin_1.8@60.34,164.65 64.85,164.65 Csh4_Digit_1.1@67,166.8
CSA_IN-_3: CSAin_1.7 Csh6_Digit_1.1 | length 7.1
  Top Layer w0.2: CSAin_1.7@60.34,162.35 65.95,162.35 Csh6_Digit_1.1@67,161.3
CSA_IN-_4: CSAin_1.3 Csh8_Digit_1.1 | length 7.7
  Top Layer w0.2: CSAin_1.3@60.34,153.15 64.55,153.15 Csh8_Digit_1.1@67,155.6
CSA_IN-_5: CSAin_1.2 Csh2_Digit_2.1 | length 7.1
  Top Layer w0.2: CSAin_1.2@60.34,150.85 65.85,150.85 Csh2_Digit_2.1@67,149.7
CSA_IN-_6: CSAin_1.1 Csh4_Digit_2.1 | length 8.5
  Top Layer w0.2: CSAin_1.1@60.34,148.55 62.45,148.55 Csh4_Digit_2.1@67,144
CSA_IN-_7: CSAin_2.9 Csh6_Digit_2.1 | length 9.2
  Top Layer w0.2: CSAin_2.9@59.94,99.35 60.85,99.35 66,104.5 66.746,104.5 Csh6_Digit_2.1@67,104.5
CSA_IN-_8: CSAin_2.8 Csh8_Digit_2.1 | length 7.8
  Top Layer w0.2: CSAin_2.8@59.94,97.05 64.25,97.05 66,98.8 66.746,98.8 Csh8_Digit_2.1@67,98.8
CSA_IN-_9: CSAin_2.7 Csh2_Digit_3.1 | length 7.8
  Top Layer w0.2: CSAin_2.7@59.94,94.75 64.25,94.75 66,93 66.746,93 Csh2_Digit_3.1@67,93
CSA_IN-_10: CSAin_2.3 Csh4_Digit_3.1 | length 7.8
  Top Layer w0.2: CSAin_2.3@59.94,85.55 64.25,85.55 66,87.3 66.746,87.3 Csh4_Digit_3.1@67,87.3
CSA_IN-_11: CSAin_2.2 Csh6_Digit_3.1 | length 7.7
  Top Layer w0.2: CSAin_2.2@59.94,83.25 64.55,83.25 66,81.8 66.746,81.8 Csh6_Digit_3.1@67,81.8
CSA_IN-_12: CSAin_2.1 Csh8_Digit_3.1 | length 9.1
  Top Layer w0.2: CSAin_2.1@59.94,80.95 61.15,80.95 66,76.1 66.746,76.1 Csh8_Digit_3.1@67,76.1
DEN: UFL1.19
DGND: C17.1 C18.1 C19.1 C20.1 C21.1 C22.1 C23.1 C24.1 C25.1 C26.1 C27.1 C28.1 C29.1 C30.1 C31.1 C32.1 C33.1 C34.1 C35.1 C36.1 C37.1 C38.1 C39.1 C40.1 C41.1 C42.1 C43.1 C44.1 C45.1 C46.1 C47.1 C48.1 C49.1 C50.1 C51.1 C52.1 C53.2 C54.1 C55.1 C56.1 C57.1 C58.1 C59.2 C60.1 Cclk1.1 CFL1.1 Cgen1.1 CIO1.1 CIO2.1 CIO3.1 CIO4.1 CLED1.2 CLED2.2 CLED3.2 CLED4.2 CSL1.2 CSL2.2 Csup2.- Csup3.2 Csup4.2 Csup5.2 Csup6.2 Csup7.2 Csup11.- Csup12.- Csup13.- Csup14.- Csup15.- Csup17.2 Csup18.2 Csup19.2 Csup20.2 Csup21.2 Cudig9_Digit_1.1 Cudig9_Digit_2.1 Cudig9_Digit_3.1 Cudig10_Digit_1.1 Cudig10_Digit_2.1 Cudig10_Digit_3.1 Cudig11_Digit_1.1 Cudig11_Digit_2.1 Cudig11_Digit_3.1 ExtReset1.2 JEth1.10 LrefGND1_Digit_1.2 LrefGND1_Digit_2.2 LrefGND1_Digit_3.2 LX1.3 R42.1 R43.2 R44.2 R47.2 R52.2 RSL4.2 RSL8.2 U4.A1 U4.A11 U4.A12 U4.A22 U4.AA2 U4.AA11 U4.AA12 U4.AA22 U4.AB1 U4.AB6 U4.AB11 U4.AB12 U4.AB22 U4.B11 U4.B12 U4.C5 U4.C9 U4.C11 U4.C12 U4.C14 U4.C16 U4.C18 U4.D3 U4.D8 U4.E18 U4.E20 U4.F3 U4.F5 U4.F12 U4.G2 U4.G20 U4.G21 U4.G22 U4.H3 U4.H12 U4.H13 U4.J9 U4.J15 U4.J19 U4.K3 U4.K10 U4.K11 U4.K12 U4.K13 U4.K16 U4.K20 U4.L10 U4.L11 U4.L12 U4.L13 U4.L15 U4.L17 U4.L20 U4.M10 U4.M11 U4.M12 U4.M13 U4.M17 U4.N3 U4.N10 U4.N11 U4.N12 U4.N13 U4.N15 U4.P8 U4.P19 U4.R3 U4.R9 U4.R11 U4.R13 U4.T1 U4.T2 U4.T20 U4.T21 U4.T22 U4.U3 U4.U5 U4.V18 U4.V20 U4.W3 U4.Y5 U4.Y9 U4.Y11 U4.Y12 U4.Y15 U4.Y16 U4.Y18 U4.Y20 U5.2 U5.10 U6.4 U7.2 U7.10 U8.5 U8.6 U8.7 U8.11 U8.12 U8.13 U8.14 U8.15 U8.16 U8.18 U8.25 U8.26 U8.32 U8.33 U8.34 U8.35 U8.39 U8.41 U8.43 U8.50 U8.54 U8.61 Uclk1.5 UDFL1.1 UDFL2.1 UDFL3.1 UFL1.6 UFL1.9 UFL1.12 UFL1.16 UFL1.29 UFL1.32 UFL1.41 UFL1.44 UFL1.51 UFL1.52 UFL1.59 UFL1.60 UFL1.61 UFL1.68 UFL1.74 UFL1.76 UFL1.78 UFL1.79 UFL1.80 UFL2.1 UG1.2 UG2.5 UG3.6 UG3.11 UG3.13 UL1.3 UL1.4 UL1.5 UL2.5 Uref3.1 Uref4.1 Uref5.1 Uref6.1 Uref7.1 VDLED4.CATH XFL.4 XFL.5 XFL.6 XSL.5 XSL.6 | length 98
  Top Layer w0.2: v1(130,113.5) U4.A22@130.5,114 ; 130,129.5 U4.T22@130.5,129 ; v1(130,134.5) U4.AA22@130.5,134 ; v1(130,135.5) U4.AB22@130.5,135 ; 131,119.5 U4.G21@131.5,120 ; v1(131,129.5) U4.T21@131.5,129 ; U8.5@132,92 U8.6@132.5,92 U8.7@133,92 ; v1@132,117.5 U4.E20@132.5,118 ; v1@132,119.5 U4.G20@132.5,120 ; v1(132,122.5) U4.K20@132.5,123 ; v1@132,123.5 U4.L20@132.5,124 ; v1(132,129.5) U4.T20@132.5,129 ; v1(132,131.5) U4.V20@132.5,131 ; v1(132,133.5) U4.Y20@132.5,133 ; v1(133,121.5) U4.J19@133.5,122 ; v1(133,127.5) U4.P19@133.5,127 ; v1(134,115.5) U4.C18@134.5,116 ; v1(134,117.5) U4.E18@134.5,118 ; v1(134,131.5) U4.V18@134.5,131 ; v1(134,133.5) U4.Y18@134.5,133 ; U8.11@135,92 U8.12@135.5,92 U8.13@136,92 U8.14@136.5,92 U8.15@137,92 U8.16@137.5,92 ; v1(135,123.5) U4.L17@135.5,124 ; v1(135,125.5) U4.M17@135.5,125 ; v1(136,115.5) U4.C16@136.5,116 ; v1(136,122.5) U4.K16@136.5,123 ; v1(136,133.5) U4.Y16@136.5,133 ; U8.35@136.5,103.4 U8.34@137,103.4 U8.33@137.5,103.4 ; v1(137,121.5) U4.J15@137.5,122 ; v1(137,123.5) U4.L15@137.5,124 ; v1(137,126.5) U4.N15@137.5,126 ; v1(137,133.5) U4.Y15@137.5,133 ; v1(138,115.5) U4.C14@138.5,116 ; v1(139,120.5) U4.H13@139.5,121 ; v1(139,122.5) U4.K13@139.5,123 ; v1(139,123.5) U4.L13@139.5,124 ; v1(139,125.5) U4.M13@139.5,125 ; v1(139,126.5) U4.N13@139.5,126 ; v1(139,128.5) U4.R13@139.5,128 ; U8.25@139.45,97.95 U8.26@139.45,98.45 ; 140,114.5 U4.B12@140.5,115 ; v1(140,115.5) U4.C12@140.5,116 ; v1(140,118.5) U4.F12@140.5,119 ; v1(140,120.5) U4.H12@140.5,121 ; v1(140,122.5) U4.K12@140.5,123 ; v1(140,123.5) U4.L12@140.5,124 ; v1(140,125.5) U4.M12@140.5,125 ; v1(140,126.5) U4.N12@140.5,126 ; v1(140,133.5) U4.Y12@140.5,133 ; 140,134.5 U4.AA12@140.5,134 ; U4.B11@141.5,115 142,114.5 ; U4.C11@141.5,116 v1(142,115.5) ; U4.K11@141.5,123 v1(142,122.5) ; U4.L11@141.5,124 v1(142,123.5) ; U4.M11@141.5,125 v1@142,125.5 ; U4.N11@141.5,126 v1(142,126.5) ; U4.R11@141.5,128 v1(142,128.5) ; U4.Y11@141.5,133 v1(142,133.5) ; U4.AA11@141.5,134 142,134.5 ; U4.K10@142.5,123 v1(143,122.5) ; U4.L10@142.5,124 v1(143,123.5) ; U4.M10@142.5,125 v1(143,125.5) ; U4.N10@142.5,126 v1(143,126.5) ; U4.C9@143.5,116 v1(144,115.5) ; U4.J9@143.5,122 v1(144,121.5) ; U4.R9@143.5,128 v1(144,128.5) ; U4.Y9@143.5,133 v1(144,133.5) ; U4.P8@144.5,127 v1(145,127.5) ; U4.D8@144.5,117 v1(145,116.5) ; U4.AB6@146.5,135 147,135.5 ; U4.C5@147.5,116 v1(148,115.5) ; U4.F5@147.5,119 v1(148,118.5) ; U4.U5@147.5,130 v1(148,130.5) ; U4.Y5@147.5,133 v1(148,133.5) ; U4.D3@149.5,117 v1(150,116.5) ; U4.F3@149.5,119 v1(150,118.5) ; U4.H3@149.5,121 v1(150,120.5) ; U4.K3@149.5,123 v1(150,122.5) ; U4.N3@149.5,126 v1(150,126.5) ; U4.R3@149.5,128 v1(150,128.5) ; U4.U3@149.5,130 v1(150,130.5) ; U4.W3@149.5,132 v1(150,132.5) ; U4.G2@150.5,120 v1(151,119.5) ; U4.T2@150.5,129 151,129.5 ; U4.AA2@150.5,134 v1(151,134.5) ; U4.A1@151.5,114 v1(152,113.5) ; U4.AB1@151.5,135 v1(152,135.5) ; v7(152.5,176.4) 153.36,175.54 UL2.5@155,175.54 ; v7(152.5,186.4) 152.91,186.81 UL1.4@155,186.81 ; UL1.5@155,185.54 UL1.4@155,186.81 ; UL1.3@155,188.08 UL1.4@155,186.81
  Top Layer w0.254: UFL1.16@134.5,157.5 137.066,157.5 138.062,156.504 ; UFL1.12@134.5,159.5 136.805,159.5 ; UFL1.9@134.5,161 135.599,161 135.916,161.317 ; UFL1.6@134.5,162.5 135.862,162.5 ; UFL1.78@137.3,166.8 137.3,168.162 137.313,168.175 ; UFL1.76@138.3,166.8 138.3,168.162 ; UFL1.74@139.3,166.8 139.3,168.162 ; UFL1.68@142.3,166.8 142.3,168.162 ; 145.8,165.438 UFL1.61@145.8,166.8 ; UFL1.44@147.6,157 148.962,157 ; UFL1.51@147.6,160.5 148.962,160.5 ; UFL1.52@147.6,161 148.962,161 ; UFL1.59@147.6,164.5 148.962,164.5 ; 160.603,133.357 U5.2@164.46,129.5
  other v1: 132,117.5 132,119.5 132,123.5 142,125.5
  other v3: 113.6,79.9 115.4,79.9 117.2,79.9 118.9,79.9 113.6,81.7 115.4,81.7 117.2,81.7 118.9,81.7 113.6,83.5 115.4,83.5 117.2,83.5 118.9,83.5 113.6,85.2 115.4,85.2 117.2,85.2 118.9,85.2 113.6,119.7 115.4,119.7 117.2,119.7 118.9,119.7 113.6,121.5 115.4,121.5 117.2,121.5 118.9,121.5 113.6,123.3 115.4,123.3 117.2,123.3 118.9,123.3 113.6,125 115.4,125 117.2,125 118.9,125
  other v5: 131.27,97.715 136.35,97.715 142.305,100.255
ERR_LIGHT: RLED3.2
ETHVCCA: C58.2 L1.2 L2.1 U8.21 U8.22 | length 11.6
  Top Layer w0.2: U8.22@139.45,96.45 U8.21@139.45,95.95 141.35,95.95 v5(141.8,95.5)
  Bottom Layer w0.2: L1.2@136.3,94.5 140.8,94.5 142.3,96 L2.1@144.2,96
EXT_RESET: ExtReset1.1
FCLKM_Digit_1: U3_Digit_1.49 | length 4.7
  Top Layer w0.2: U3_Digit_1.49@120.4,161.8 124.8,161.8 v1(125,162)
FCLKM_Digit_2: U3_Digit_2.49 | length 4
  Top Layer w0.175: U3_Digit_2.49@120.4,122.1 121.2,122.1 121.6,122.5 123.5,122.5 v1(124,123)
FCLKM_Digit_3: U3_Digit_3.49 | length 4.3
  Top Layer w0.175: U3_Digit_3.49@120.4,82.3 121.2,82.3 121.6,82.7 123,82.7 123.5,83.2 v1(123.5,84)
FCLKP_Digit_1: U3_Digit_1.48 | length 5.2
  Top Layer w0.2: U3_Digit_1.48@120.4,161.3 125.2,161.3 v1(125.5,161)
FCLKP_Digit_2: U3_Digit_2.48 | length 3.8
  Top Layer w0.175: U3_Digit_2.48@120.4,121.6 121.6,121.6 122,122 v1(124,122)
FCLKP_Digit_3: U3_Digit_3.48 | length 4
  Top Layer w0.175: U3_Digit_3.48@120.4,81.8 121.6,81.8 122,82.2 123.5,82.2 v1(124,82.7)
FLDATA1: UFL1.21
FLDATA2: UFL1.22
FLDATA3: UFL1.23
FLDATA4: UFL1.24
FLDATA5: UFL1.25
FLDATA6: UFL1.26
FLDATA7: UFL1.27
FLDATA8: UFL1.28
FLDATA9: UFL1.33
FLDATA10: UFL1.34
FLDATA11: UFL1.35
FLDATA12: UFL1.36
FLDATA13: UFL1.37
FLDATA14: UFL1.38
FQUARTZ: R44.1 U8.1 | length 4
  Top Layer w0.2: R44.1@128.5,89.5 v5(128.5,92) U8.1@130,92
HI1: RFL1.2
LED2: JEth1.2 R49.2 R53.2 | length 10.1
  Top Layer w0.508: R53.2@150,106.5 R49.2@150,104 152,104 153.34,102.66 JEth1.2@157,102.66
LED3: JEth1.11 R50.2 R51.2 | length 12.4
  Top Layer w0.508: R50.2@148,89 R51.2@150.2,89 ; R51.2@150.4,88.8 R51.2@150.6,89 ; R51.2@150.5,89 R51.2@150.5,89.356 150.5,92 151.62,93.12 JEth1.11@157,93.12
LINKCLK: UG2.7 UL1.7 | length 8.1
  Top Layer w0.2: v7(147.5,181.5) 153.5,181.5 UL1.7@155,183
NBIT0: UFL1.39
NBIT1: UFL1.40
NCONFIG: R37.2 U4.K5 U5.5 | length 8.7
  Top Layer w0.2: U4.K5@147.5,123 v1(148,122.5)
  Bottom Layer w0.254: 162.936,135.85 165.73,135.85 U5.5@167,134.58
  Bottom Layer w0.305: U5.5@167,134.58 169.389,132.191
NetC59_1: C59.1 R45.1 R46.2 | length 3.1
  Top Layer w0.2: R46.2@150,98.7 R45.1@150,97.1 C59.1@151.5,97.1
NetC60_2: C60.2 JEth1.5 L2.2 | length 11.7
  Top Layer w0.2: v5(153.2,98.8) 153.82,99.42 JEth1.5@157,99.42
  Bottom Layer w0.2: L2.2@146.74,96 149.967,96 152.767,98.8 v5(153.2,98.8)
NetC61_1: C61.1 JEth1.7 R46.1 | length 11.6
  Top Layer w0.2: C61.1@148.5,98.8 148.5,100 149.1,100.6 R46.1@150,100.6 150.4,100.6 151.5,99.5 151.5,99 153.12,97.38 JEth1.7@157,97.38
NetC61_2: C61.2 U8.23 | length 9.8
  Top Layer w0.2: U8.23@139.45,96.95 143.05,96.95 143.9,96.1 147.6,96.1 C61.2@148.5,97
NetC62_1: C62.1 JEth1.8 R45.2 | length 10.5
  Top Layer w0.2: C62.1@147,95.2 148.2,95.2 149.2,96.2 153.3,96.2 153.46,96.36 JEth1.8@157,96.36
NetC62_2: C62.2 U8.24 | length 7.7
  Top Layer w0.2: U8.24@139.45,97.45 146.55,97.45 C62.2@147,97
NetC84_Digit_1_1: C84_Digit_1.1 R37_Digit_1.1 Usup1_Digit_1.1 | length 3
  Bottom Layer w0.2: Usup1_Digit_1.1@113,174 C84_Digit_1.1@113,175.5 R37_Digit_1.1@113,177
NetC84_Digit_1_2: C84_Digit_1.2 R38_Digit_1.1 Usup1_Digit_1.4 | length 9
  Bottom Layer w0.2: Usup1_Digit_1.4@110.85,172.1 109.4,172.1 108.5,173 108.5,174.5 109.5,175.5 C84_Digit_1.2@111.2,175.5 111.2,176.7 R38_Digit_1.1@111.5,177
NetC84_Digit_2_1: C84_Digit_2.1 R37_Digit_2.1 Usup1_Digit_2.1 | length 3
  Bottom Layer w0.2: R37_Digit_2.1@107.5,111.5 C84_Digit_2.1@107.5,113 Usup1_Digit_2.1@107.5,114.5
NetC84_Digit_2_2: C84_Digit_2.2 R38_Digit_2.1 Usup1_Digit_2.4 | length 9
  Bottom Layer w0.2: R38_Digit_2.1@109,111.5 109.3,111.8 C84_Digit_2.2@109.3,113 111,113 112,114 112,115.5 111.1,116.4 Usup1_Digit_2.4@109.65,116.4
NetC84_Digit_3_1: C84_Digit_3.1 R37_Digit_3.1 Usup1_Digit_3.1 | length 3
  Bottom Layer w0.2: Usup1_Digit_3.1@104.7,66 C84_Digit_3.1@104.7,67.5 R37_Digit_3.1@104.7,69
NetC84_Digit_3_2: C84_Digit_3.2 R38_Digit_3.1 Usup1_Digit_3.4 | length 9
  Bottom Layer w0.2: Usup1_Digit_3.4@102.55,64.1 101.1,64.1 100.2,65 100.2,66.5 101.2,67.5 C84_Digit_3.2@102.9,67.5 102.9,68.7 R38_Digit_3.1@103.2,69
NetCLED2_1: CLED2.1 RLED1.1 VDLED2.CATH
NetCLED3_1: CLED3.1 RLED2.1 VDLED1.CATH
NetCLED4_1: CLED4.1 RLED3.1 VDLED3.CATH
NetCsh1_Digit_1_2: Csh1_Digit_1.2 Rsh1_Digit_1.2 Rsh5_Digit_1.1 | length 4.2
  Top Layer w0.2: Csh1_Digit_1.2@68.8,169.3 69.054,169.3 Rsh5_Digit_1.1@70.746,169.3 Rsh5_Digit_1.1@71,169.3 ; 70,169.3 v2(70,170)
  Bottom Layer w0.2: Rsh1_Digit_1.2@68.7,170 v2(70,170)
NetCsh1_Digit_2_2: Csh1_Digit_2.2 Rsh1_Digit_2.2 Rsh5_Digit_2.1 | length 4.2
  Top Layer w0.2: Csh1_Digit_2.2@68.8,146.5 69.054,146.5 Rsh5_Digit_2.1@70.746,146.5 Rsh5_Digit_2.1@71,146.5 ; 70,146.5 v2(70,147.2)
  Bottom Layer w0.2: Rsh1_Digit_2.2@68.7,147.2 v2(70,147.2)
NetCsh1_Digit_3_2: Csh1_Digit_3.2 Rsh1_Digit_3.2 Rsh5_Digit_3.1 | length 4.2
  Top Layer w0.2: Csh1_Digit_3.2@68.8,89.8 69.054,89.8 Rsh5_Digit_3.1@70.746,89.8 Rsh5_Digit_3.1@71,89.8 ; 70,89.8 v2(70,90.5)
  Bottom Layer w0.2: Rsh1_Digit_3.2@68.7,90.5 v2(70,90.5)
NetCsh2_Digit_1_2: Csh2_Digit_1.2 Rsh1_Digit_1.1 Rsh6_Digit_1.1 | length 4.2
  Top Layer w0.2: Csh2_Digit_1.2@68.8,172.5 Rsh6_Digit_1.1@71,172.5 ; v2(70,171.8) 70,172.5
  Bottom Layer w0.2: Rsh1_Digit_1.1@68.7,171.8 v2(70,171.8)
NetCsh2_Digit_2_2: Csh2_Digit_2.2 Rsh1_Digit_2.1 Rsh6_Digit_2.1 | length 4.2
  Top Layer w0.2: Csh2_Digit_2.2@68.8,149.7 Rsh6_Digit_2.1@71,149.7 ; v2(70,149) 70,149.7
  Bottom Layer w0.2: Rsh1_Digit_2.1@68.7,149 v2(70,149)
NetCsh2_Digit_3_2: Csh2_Digit_3.2 Rsh1_Digit_3.1 Rsh6_Digit_3.1 | length 4.2
  Top Layer w0.2: Csh2_Digit_3.2@68.8,93 Rsh6_Digit_3.1@71,93 ; v2(70,92.3) 70,93
  Bottom Layer w0.2: Rsh1_Digit_3.1@68.7,92.3 v2(70,92.3)
NetCsh3_Digit_1_2: Csh3_Digit_1.2 Rsh2_Digit_1.2 Rsh7_Digit_1.1 | length 4.2
  Top Layer w0.2: Csh3_Digit_1.2@68.8,163.6 69.054,163.6 Rsh7_Digit_1.1@70.746,163.6 Rsh7_Digit_1.1@71,163.6 ; 70,163.6 v2(70,164.3)
  Bottom Layer w0.2: Rsh2_Digit_1.2@68.7,164.3 v2(70,164.3)
NetCsh3_Digit_2_2: Csh3_Digit_2.2 Rsh2_Digit_2.2 Rsh7_Digit_2.1 | length 4.2
  Top Layer w0.2: Csh3_Digit_2.2@68.8,140.8 69.054,140.8 Rsh7_Digit_2.1@70.746,140.8 Rsh7_Digit_2.1@71,140.8 ; 70,140.8 v2(70,141.5)
  Bottom Layer w0.2: Rsh2_Digit_2.2@68.7,141.5 v2(70,141.5)
NetCsh3_Digit_3_2: Csh3_Digit_3.2 Rsh2_Digit_3.2 Rsh7_Digit_3.1 | length 4.2
  Top Layer w0.2: Csh3_Digit_3.2@68.8,84.1 69.054,84.1 Rsh7_Digit_3.1@70.746,84.1 Rsh7_Digit_3.1@71,84.1 ; 70,84.1 v2(70,84.8)
  Bottom Layer w0.2: Rsh2_Digit_3.2@68.7,84.8 v2(70,84.8)
NetCsh4_Digit_1_2: Csh4_Digit_1.2 Rsh2_Digit_1.1 Rsh8_Digit_1.1 | length 4.2
  Top Layer w0.2: Csh4_Digit_1.2@68.8,166.8 Rsh8_Digit_1.1@71,166.8 ; v2(70,166.1) 70,166.8
  Bottom Layer w0.2: Rsh2_Digit_1.1@68.7,166.1 v2(70,166.1)
NetCsh4_Digit_2_2: Csh4_Digit_2.2 Rsh2_Digit_2.1 Rsh8_Digit_2.1 | length 4.2
  Top Layer w0.2: Csh4_Digit_2.2@68.8,144 Rsh8_Digit_2.1@71,144 ; v2(70,143.3) 70,144
  Bottom Layer w0.2: Rsh2_Digit_2.1@68.7,143.3 v2(70,143.3)
NetCsh4_Digit_3_2: Csh4_Digit_3.2 Rsh2_Digit_3.1 Rsh8_Digit_3.1 | length 4.2
  Top Layer w0.2: Csh4_Digit_3.2@68.8,87.3 Rsh8_Digit_3.1@71,87.3 ; v2(70,86.6) 70,87.3
  Bottom Layer w0.2: Rsh2_Digit_3.1@68.7,86.6 v2(70,86.6)
NetCsh5_Digit_1_2: Csh5_Digit_1.2 Rsh3_Digit_1.2 Rsh9_Digit_1.1 | length 4.2
  Top Layer w0.2: Csh5_Digit_1.2@68.8,158.1 69.054,158.1 Rsh9_Digit_1.1@70.746,158.1 Rsh9_Digit_1.1@71,158.1 ; 70,158.1 v2(70,158.8)
  Bottom Layer w0.2: Rsh3_Digit_1.2@68.7,158.8 v2(70,158.8)
NetCsh5_Digit_2_2: Csh5_Digit_2.2 Rsh3_Digit_2.2 Rsh9_Digit_2.1 | length 4.2
  Top Layer w0.2: Csh5_Digit_2.2@68.8,101.3 69.054,101.3 Rsh9_Digit_2.1@70.746,101.3 Rsh9_Digit_2.1@71,101.3 ; 70,101.3 v2(70,102)
  Bottom Layer w0.2: Rsh3_Digit_2.2@68.7,102 v2(70,102)
NetCsh5_Digit_3_2: Csh5_Digit_3.2 Rsh3_Digit_3.2 Rsh9_Digit_3.1 | length 4.2
  Top Layer w0.2: Csh5_Digit_3.2@68.8,78.6 69.054,78.6 Rsh9_Digit_3.1@70.746,78.6 Rsh9_Digit_3.1@71,78.6 ; 70,78.6 v2(70,79.3)
  Bottom Layer w0.2: Rsh3_Digit_3.2@68.7,79.3 v2(70,79.3)
NetCsh6_Digit_1_2: Csh6_Digit_1.2 Rsh3_Digit_1.1 Rsh10_Digit_1.1 | length 4.2
  Top Layer w0.2: Csh6_Digit_1.2@68.8,161.3 Rsh10_Digit_1.1@71,161.3 ; v2(70,160.6) 70,161.3
  Bottom Layer w0.2: Rsh3_Digit_1.1@68.7,160.6 v2(70,160.6)
NetCsh6_Digit_2_2: Csh6_Digit_2.2 Rsh3_Digit_2.1 Rsh10_Digit_2.1 | length 4.2
  Top Layer w0.2: Csh6_Digit_2.2@68.8,104.5 Rsh10_Digit_2.1@71,104.5 ; v2(70,103.8) 70,104.5
  Bottom Layer w0.2: Rsh3_Digit_2.1@68.7,103.8 v2(70,103.8)
NetCsh6_Digit_3_2: Csh6_Digit_3.2 Rsh3_Digit_3.1 Rsh10_Digit_3.1 | length 4.2
  Top Layer w0.2: Csh6_Digit_3.2@68.8,81.8 Rsh10_Digit_3.1@71,81.8 ; v2(70,81.1) 70,81.8
  Bottom Layer w0.2: Rsh3_Digit_3.1@68.7,81.1 v2(70,81.1)
NetCsh7_Digit_1_2: Csh7_Digit_1.2 Rsh4_Digit_1.2 Rsh11_Digit_1.1 | length 4.2
  Top Layer w0.2: Csh7_Digit_1.2@68.8,152.4 69.054,152.4 Rsh11_Digit_1.1@70.746,152.4 Rsh11_Digit_1.1@71,152.4 ; 70,152.4 v2(70,153.1)
  Bottom Layer w0.2: Rsh4_Digit_1.2@68.7,153.1 v2(70,153.1)
NetCsh7_Digit_2_2: Csh7_Digit_2.2 Rsh4_Digit_2.2 Rsh11_Digit_2.1 | length 4.2
  Top Layer w0.2: Csh7_Digit_2.2@68.8,95.6 69.054,95.6 Rsh11_Digit_2.1@70.746,95.6 Rsh11_Digit_2.1@71,95.6 ; 70,95.6 v2(70,96.3)
  Bottom Layer w0.2: Rsh4_Digit_2.2@68.7,96.3 v2(70,96.3)
NetCsh7_Digit_3_2: Csh7_Digit_3.2 Rsh4_Digit_3.2 Rsh11_Digit_3.1 | length 4.2
  Top Layer w0.2: Csh7_Digit_3.2@68.8,72.9 69.054,72.9 Rsh11_Digit_3.1@70.746,72.9 Rsh11_Digit_3.1@71,72.9 ; 70,72.9 v2(70,73.6)
  Bottom Layer w0.2: Rsh4_Digit_3.2@68.7,73.6 v2(70,73.6)
NetCsh8_Digit_1_2: Csh8_Digit_1.2 Rsh4_Digit_1.1 Rsh12_Digit_1.1 | length 4.2
  Top Layer w0.2: Csh8_Digit_1.2@68.8,155.6 Rsh12_Digit_1.1@71,155.6 ; v2(70,154.9) 70,155.6
  Bottom Layer w0.2: Rsh4_Digit_1.1@68.7,154.9 v2(70,154.9)
NetCsh8_Digit_2_2: Csh8_Digit_2.2 Rsh4_Digit_2.1 Rsh12_Digit_2.1 | length 4.2
  Top Layer w0.2: Csh8_Digit_2.2@68.8,98.8 Rsh12_Digit_2.1@71,98.8 ; v2(70,98.1) 70,98.8
  Bottom Layer w0.2: Rsh4_Digit_2.1@68.7,98.1 v2(70,98.1)